# Altium PCB Altium_PCB_STM8_DevBoard_2024-07-22.pcbdoc
Units mm, origin at the board's own origin, x right, y up, seen from the top; angles counter-clockwise.
Board outline 85.34 x 122.81 mm, 2 copper layers (Top Layer, Bottom Layer); 28 components, 47 nets, 163 pads, 33 vias.
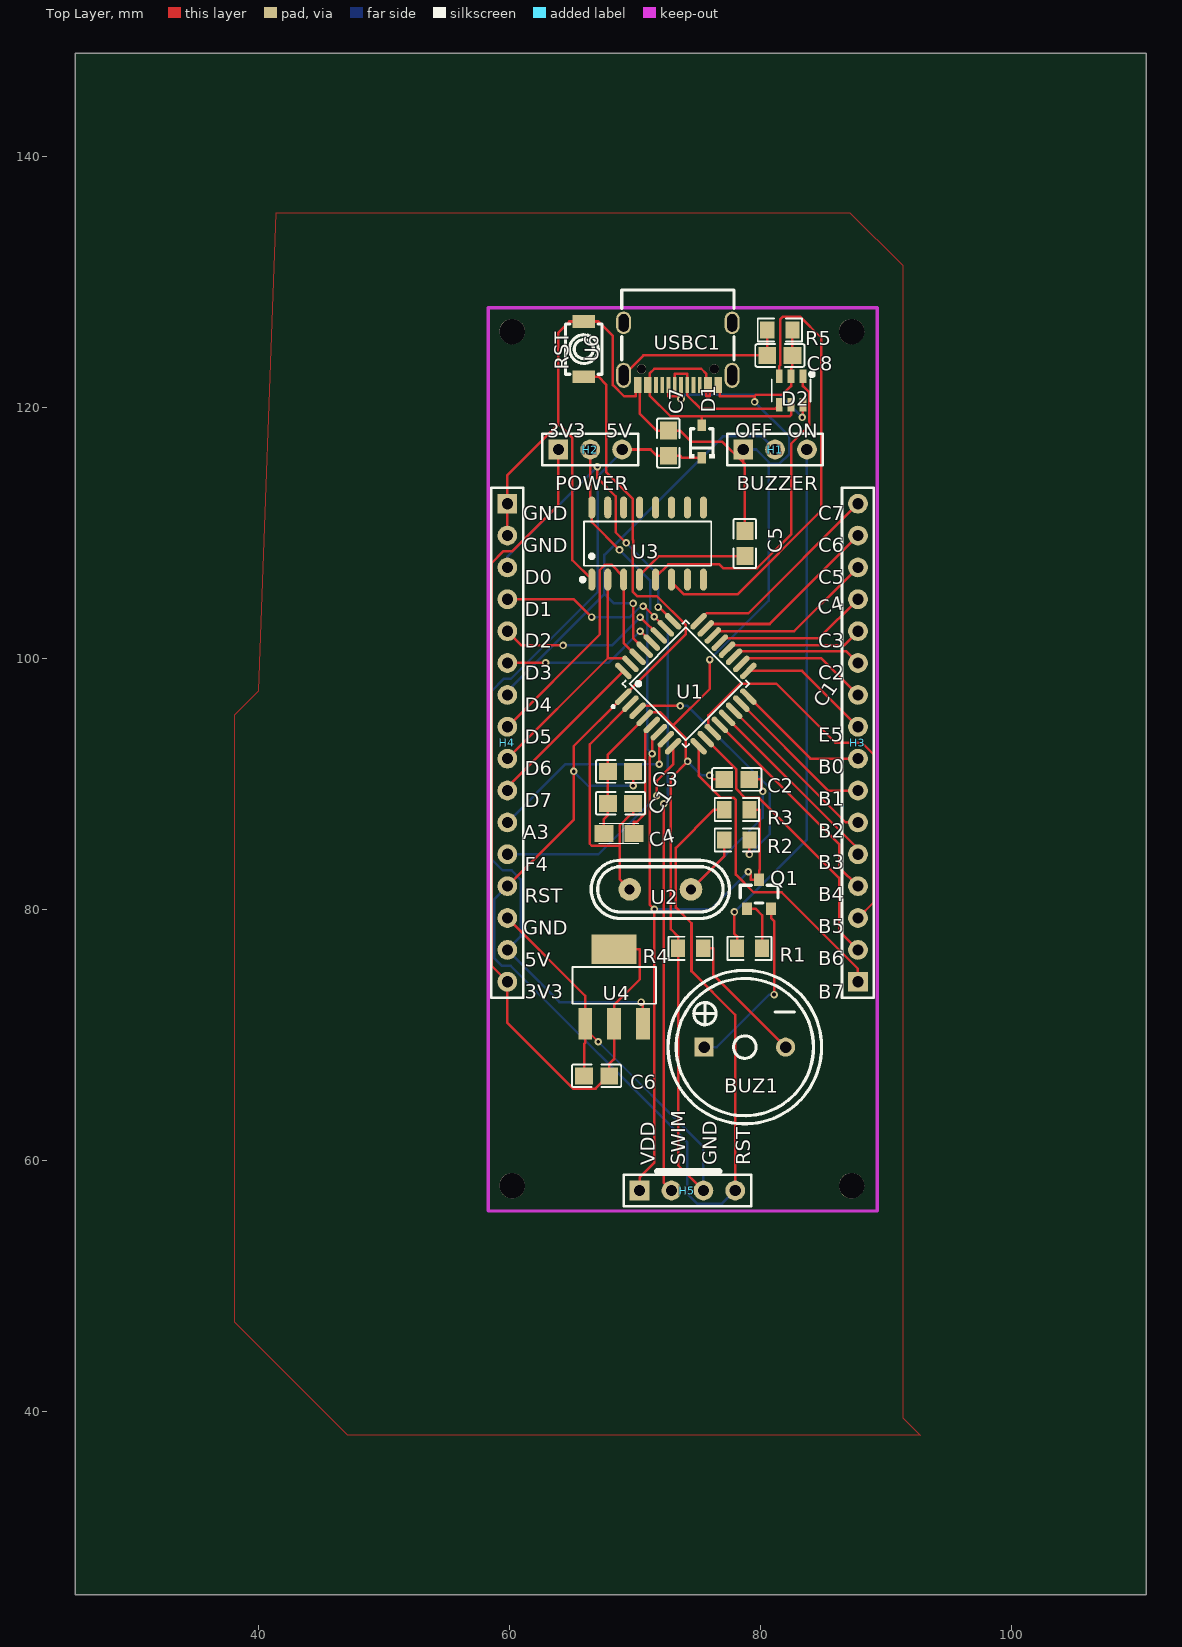
[diagram p0: Top Layer view]
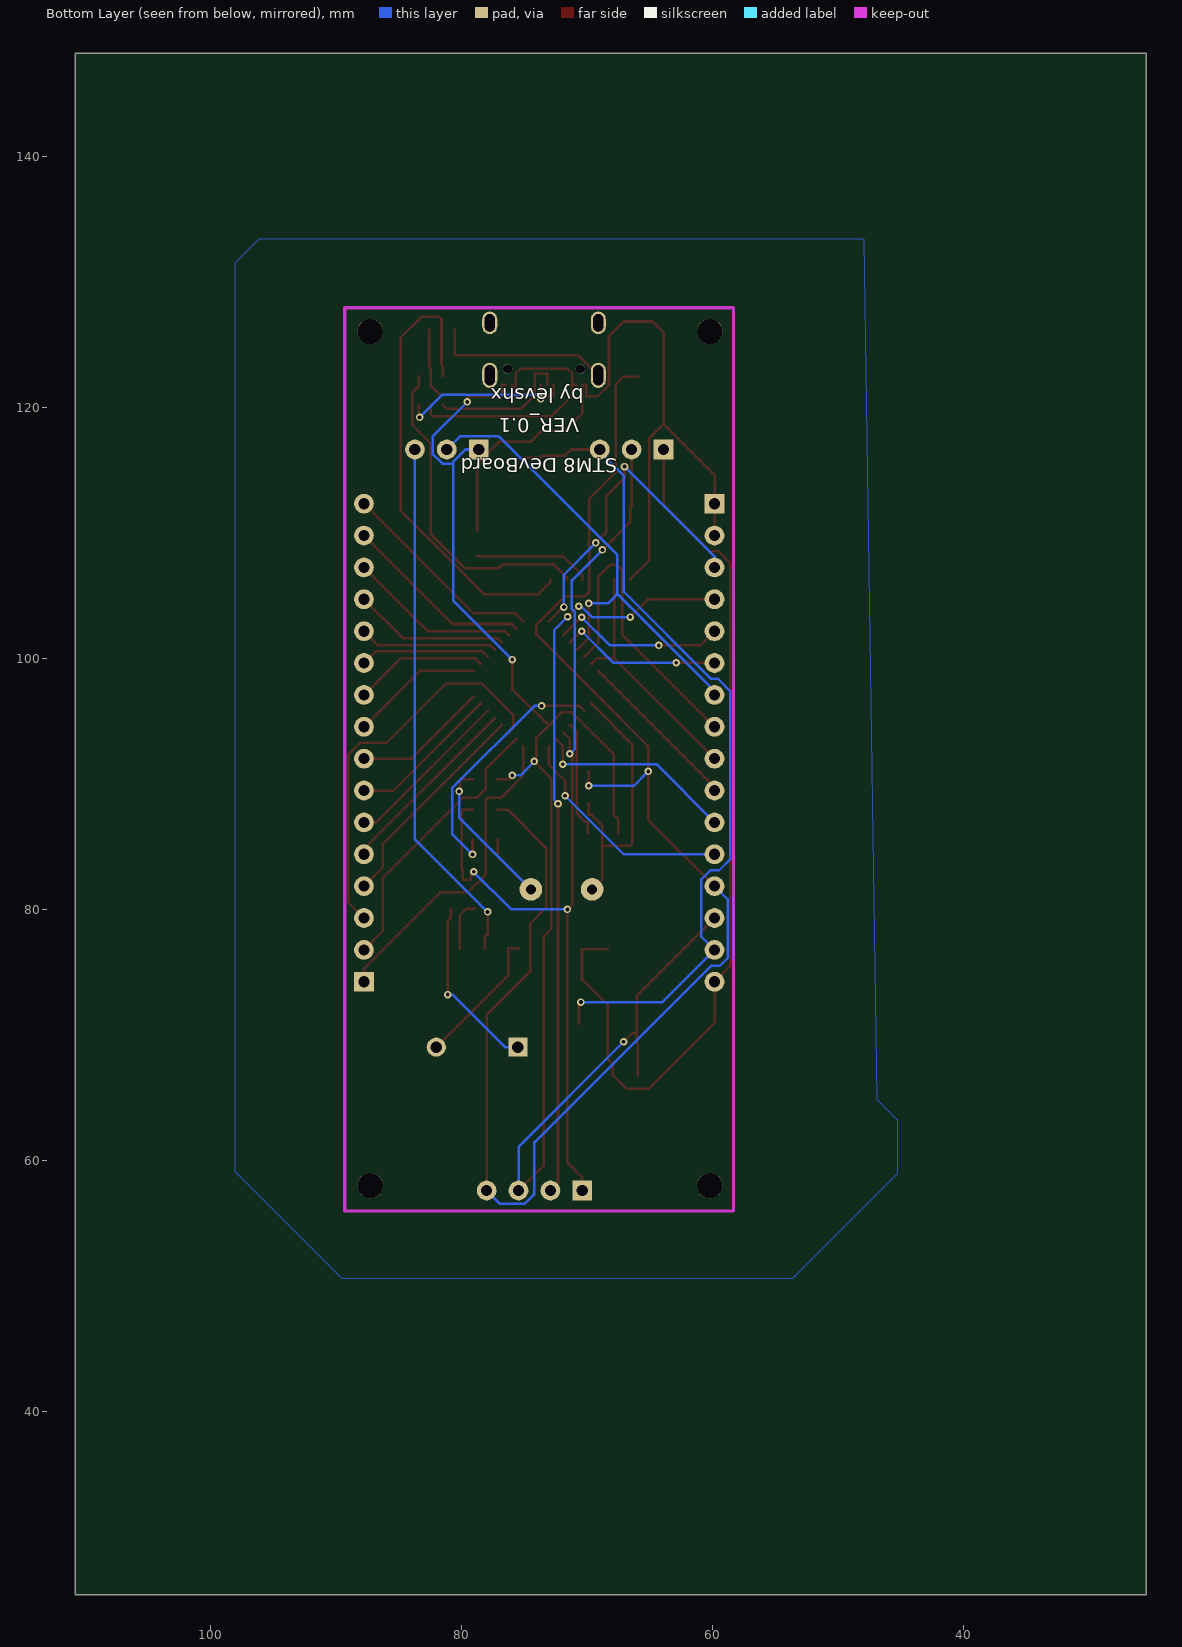
[diagram p1: Bottom Layer view, seen from below]

## Layer stack, top to bottom
Top Layer: signal copper (thickness not stored)
Dielectric: dielectric 0.32, FR-4, Dk 4.8
Bottom Layer: signal copper (thickness not stored)

## Board outline
110.744,25.4 25.4,25.4 25.4,148.209 110.744,148.209

## Components (designator, comment, footprint, x,y, rotation, side; value= is the part's Value field where it differs from the comment)
BUZ1 "BUZZER_12X9RM6.5" BUZ-TH_BD12.0-P6.50-D0.6_SEA-1285F 78.74,69.025 r0 top
C1 "20p" C0805 68.834,88.456 r0 top
C2 "20p" C0805 78.105,90.361 r0 top
C3 "10n" C0805 68.834,90.995 r0 top
C4 "680n" CASE-A_3216 68.707,86.042 r180 top
C5 "100n" C0805 78.74,109.156 r270 top
C6 "100n" C0805 66.929,66.739 r0 top
C7 "100n" C0805 72.644,117.157 r270 top
C8 "1n" C0805 81.534,124.142 r0 top
D1 "1N5819WS S4" SOD-323_L1.6-W1.3-LS2.7-RD 75.311,117.284 r90 top
D2 "MSUSBLC6-2SC6" SOT-23-6_L2.9-W1.6-P0.95-LS2.8-BL 82.423,121.349 r180 top
H1 "HDR-F-2.54_1x3" HDR-F-2.54_1X3 81.153,116.649 r0 top
H2 "HDR-F-2.54_1x3" HDR-F-2.54_1X3 66.421,116.649 r0 top
H3 "HDR-M-2.54_1x16" HDR-F-2.54_1X16 87.757,93.281 r90 top
H4 "HDR-M-2.54_1x16" HDR-F-2.54_1X16 59.817,93.281 r270 top
H5 "HDR-M-2.54_1x4" HDR-F-2.54_1X4 74.168,57.594 r0 top
Q1 "S9013_C431712" SOT-23_L2.9-W1.3-P1.90-LS2.4-BR 79.883,81.216 r270 top
R1 "3k" R0805 79.121,76.898 r0 top
R2 "60R" R0805 78.105,85.534 r0 top
R3 "10k" R0805 78.105,87.947 r0 top
R4 "47R" R0805 74.422,76.898 r0 top
R5 "1M" R0805 81.534,126.174 r180 top
U1 "STM8S003K3T6C" LQFP-32_L7.0-W7.0-P0.80-LS9.0-BL 74.041,97.98 r315 top
U2 "16MHZ" HC-49US_L11.0-W4.6-P4.88 72.009,81.597 r180 top
U3 "CH340C" SOP-16_L10.0-W3.9-P1.27-LS6.0-BL 70.993,109.156 r0 top
U4 "AMS1117-3.3RG" SOT-223-3_L6.4-W3.5-P2.30-LS7.0-BR 68.326,73.85 r270 top
U6 "RST BTN" SW-SMD_L3.9-W2.9-LS4.9-L 65.913,124.65 r90 top
USBC1 "TYPE-C-31-M-12" USB-C_SMD-TYPE-C-31-M-12 73.406,124.269 r180 top

## Footprints (in the part's own frame and the unit in brackets; to place one, negate y for a bottom-side part, rotate by r counter-clockwise, add the part's x,y. Pads: shape width x height; smd on the part's side, far side on the other; paste and mask are expansions set on the pad)
BUZ-TH_BD12.0-P6.50-D0.6_SEA-1285F [mil]
  rect 60x60 hole 36 paste+0 mask+1.97: 1(-127.95,0)
  round 60 hole 36 paste+0 mask+1.97: 2(127.95,0)
  silkscreen extent -241,-241 241,241
C0805 [mm]
  rect 1.41x1.35 smd paste-100 mask+0.051: 1(-1,0) 2(1,0)
  silkscreen extent -1.96,-0.9 1.96,0.9
CASE-A_3216 [mm]
  rect 1.5x1.359 smd paste+0 mask+0.051: 1(-1.2,0) 2(1.2,0)
  silkscreen extent -1.6,-0.8 1.6,0.8
HC-49US_L11.0-W4.6-P4.88 [mm]
  round 1.8 hole 0.8 paste+0 mask+0.051: 1(-2.44,0) 2(2.44,0)
  silkscreen extent -5.51,-2.32 5.51,2.32
HDR-F-2.54_1X3 [mil]
  rect 62x62 hole 35 paste+0 mask+2: 1(-100,0)
  round 62 hole 35 paste+0 mask+2: 2(0,0)
  round 62 hole 36 paste+0 mask+2: 3(100,0)
  silkscreen extent -150,-49 150,50
HDR-F-2.54_1X4 [mil]
  rect 62x62 hole 35 paste+0 mask+2: 1(-150,0)
  round 62 hole 35 paste+0 mask+2: 2(-50,0) 3(50,0) 4(150,0)
  silkscreen extent -200,-50 200,50
HDR-F-2.54_1X16 [mil]
  rect 62x62 hole 35 paste+0 mask+2: 1(-750,0)
  round 62 hole 35 paste+0 mask+2: 2(-650,0) 3(-550,0) 4(-450,0) 5(-350,0) 6(-250,0) 7(-150,0) 8(-50,0) 9(50,0) 10(150,0) 11(250,0) 12(350,0) 13(450,0) 14(550,0) 15(650,0) 16(750,0)
  silkscreen extent -800,-50 800,50
LQFP-32_L7.0-W7.0-P0.80-LS9.0-BL [mm]
  oval 0.448x1.684 smd paste+0 mask+0.051: 1(-2.8,-4.242) 2(-2,-4.242) 3(-1.2,-4.242) 4(-0.4,-4.242) 5(0.4,-4.242) 6(1.2,-4.242) 7(2,-4.242) 8(2.8,-4.242) 17(2.8,4.242) 18(2,4.242) 19(1.2,4.242) 20(0.4,4.242) 21(-0.4,4.242) 22(-1.2,4.242) 23(-2,4.242) 24(-2.8,4.242)
  oval 1.684x0.448 smd paste+0 mask+0.051: 9(4.242,-2.8) 10(4.242,-2) 11(4.242,-1.2) 12(4.242,-0.4) 13(4.242,0.4) 14(4.242,1.2) 15(4.242,2) 16(4.242,2.8) 25(-4.242,2.8) 26(-4.242,2) 27(-4.242,1.2) 28(-4.242,0.4) 29(-4.242,-0.4) 30(-4.242,-1.2) 31(-4.242,-2) 32(-4.242,-2.8)
  silkscreen extent -3.58,-5.48 3.58,3.58
R0805 [mm]
  rect 1.133x1.377 smd paste-100 mask+0.051: 1(-1,0) 2(1,0)
  silkscreen extent -1.76,-0.92 1.76,0.92
SOD-323_L1.6-W1.3-LS2.7-RD [mm]
  rect 0.9x0.7 smd paste+0 mask+0.05: 1(-1.3,0) 2(1.3,0)
  silkscreen extent -1.32,-1.02 1.02,1.02
SOP-16_L10.0-W3.9-P1.27-LS6.0-BL [mm]
  oval 0.56x1.745 smd paste+0 mask+0.051: 1(-4.445,-2.873) 2(-3.175,-2.873) 3(-1.905,-2.873) 4(-0.635,-2.873) 5(0.635,-2.873) 6(1.905,-2.873) 7(3.175,-2.873) 8(4.445,-2.873) 9(4.445,2.873) 10(3.175,2.873) 11(1.905,2.873) 12(0.635,2.873) 13(-0.635,2.873) 14(-1.905,2.873) 15(-3.175,2.873) 16(-4.445,2.873)
  silkscreen extent -5.33,-3.02 5.08,1.77
SOT-23-6_L2.9-W1.6-P0.95-LS2.8-BL [mm]
  rect 0.532x1.072 smd paste+0 mask+0.051: 1(-0.95,-1.149) 2(0,-1.149) 3(0.95,-1.149) 4(0.95,1.149) 5(0,1.149) 6(-0.95,1.149)
  silkscreen extent -1.82,-1.45 1.54,0.89
SOT-23_L2.9-W1.3-P1.90-LS2.4-BR [mm]
  rect 1x0.8 smd paste+0 mask+0.051: 1(1.15,-0.95) 2(1.15,0.95) 3(-1.15,0)
  silkscreen extent -0.7,-1.5 0.7,1.5
SOT-223-3_L6.4-W3.5-P2.30-LS7.0-BR [mm]
  rect 2.5x1.1 smd paste+0 mask+0.051: 1(2.97,-2.3) 2(2.97,0) 3(2.97,2.3)
  rect 2.34x3.6 smd paste+0 mask+0.051: 4(-2.97,0)
  silkscreen extent -1.57,-3.33 1.37,3.33
SW-SMD_L3.9-W2.9-LS4.9-L [mm]
  rect 1x1.8 smd paste+0 mask+0.051: 1(-2.2,0) 2(2.2,0)
  silkscreen extent -2,-1.45 2,1.45
USB-C_SMD-TYPE-C-31-M-12 [mm]
  oval 1.2x2 hole 0.8 slot 1.6 at 90 deg paste+0 mask+0.051: 0(-4.325,1.706) 1(4.325,1.706)
  oval 1.2x1.8 hole 0.8 slot 1.4 at 90 deg paste+0 mask+0.051: 2(4.325,-2.474) 3(-4.325,-2.474)
  rect 0.3x1.3 smd paste-100 mask+0.051: A1(-3.35,2.474) A4(-2.55,2.474) A5(-1.25,2.474) A6(-0.25,2.474) A7(0.25,2.474) A8(1.25,2.474) A9(2.55,2.474) A12(3.35,2.474) B1(3.05,2.474) B4(2.25,2.474) B5(1.75,2.474) B6(0.75,2.474) B7(-0.75,2.474) B8(-1.75,2.474) B9(-2.25,2.474) B12(-3.05,2.474)
  round 0.75 hole 0.75 unplated paste+0: ""(-2.9,1.206) ""(2.9,1.206)
  silkscreen extent -4.47,-5.09 4.47,0.49

## Free pads (board coordinates)
  round 2.032 hole 2.032 unplated paste+0: ""(60.198,57.975) ""(60.198,126.047) ""(87.249,57.975) ""(87.249,126.047)

## Via types
v1: diameter 0.6, hole 0.305, Top Layer to Bottom Layer, tented both sides, 33 vias

## Nets (pads, with @x,y where several pads share a name; then routed paths per layer and width w, separated by ;. In a path a pad name is that pad's centre, name@x,y a point inside that pad or via, vN(x,y) a via of type N, cw(c..) or ccw(c..) an arc to the next point about the centre after c; other vN are vias at no path point)
3V3: C6.2 H2.1 H4.16 U4.2 U4.4 | length 73.1
  Top Layer w0.2: H2.1 63.881,112.221 60.181,108.521 59.478,108.521 58.572,107.615 58.572,75.476 H4.16 59.817,70.948 65.05,65.715 66.844,65.715 67.929,66.8 C6.2@67.929,67.202 ; C6.2 C6.2@67.929,67.202 ; U4.4 70.378,76.821 70.378,74.435 68.326,72.383 U4.2 68.326,68.063 67.929,67.666 C6.2@67.929,67.202
4V5: C7.2 D1.1 H2.3 H4.15 U4.3 | length 67.1
  Top Layer w0.2: H2.3 71.225,116.649 71.717,116.158 C7.2 73.571,116.158 73.744,115.985 D1.1 ; v1(70.469,72.616) 70.469,72.54 70.626,72.383 U4.3
  Bottom Layer w0.2: H2.3 68.961,116.468 67.04,114.547 67.04,105.314 60.086,98.361 59.519,98.361 58.572,97.414 58.572,83.987 59.438,83.121 60.148,83.121 60.878,82.392 60.878,77.832 H4.15 63.973,72.616 v1(70.469,72.616)
BEEP: H1.3 R1.1 | length 42.2
  Top Layer w0.2: v1(77.908,79.794) 77.908,78.052 78.121,77.839 R1.1
  Bottom Layer w0.2: v1(77.908,79.794) 83.693,85.579 H1.3
BUZ1_1: BUZ1.1 Q1.2 | length 14.3
  Top Layer w0.2: Q1.2 80.833,79.314 81.078,79.069 v1(81.078,73.208)
  Bottom Layer w0.2: BUZ1.1 76.504,69.025 80.688,73.208 v1(81.078,73.208)
BUZ1_2: BUZ1.2 R4.2 | length 11.1
  Top Layer w0.2: R4.2 76.241,76.898 76.241,74.774 BUZ1.2
C8_1: C8.1 R5.2 USBC1.1 | length 14.1
  Top Layer w0.2: USBC1.1 70.66,124.142 79.577,124.142 C8.1 R5.2
CH_3V3: C5.2 U3.4 | length 9.3
  Top Layer w0.2: U3.4 70.358,106.602 71.913,108.157 C5.2
DM: D2.3 U3.6 | length 37.7
  Top Layer w0.2: U3.6 72.898,106.091 73.884,105.105 78.144,105.105 84.834,111.796 84.834,125.554 83.17,127.218 81.752,127.218 81.575,127.041 81.575,123.388 81.473,123.286 D2.3
DP: D2.1 U3.5 | length 26.1
  Top Layer w0.2: U3.5 71.628,106.48 72.649,107.5 76.716,107.5 77.018,107.198 79.73,107.198 82.424,109.891 82.424,117.111 83.894,118.581 83.894,121.189 83.373,121.709 D2.1
GND: C1.1 C2.1 C3.1 C4.2 C5.1 C6.1 C7.1 C8.2 D2.2 H1.1 H4.1 H4.2 H4.14 H5.3 R4.1 R5.1 U1.4 U3.1 U4.1 U6.2 USBC1.A1 USBC1.A12 USBC1.B1 USBC1.B12 | length 196.6
  Top Layer w0.2: H4.14 66.026,73.102 U4.1 U4.1@66.026,70.129 ; H4.2 H4.1 59.817,114.617 63.878,118.678 ; C6.1 65.929,69.281 66.026,69.378 U4.1@66.026,70.129 ; U3.1 65.005,107.827 65.005,117.55 63.878,118.678 ; v1(67.06,69.454) 66.385,70.129 U4.1@66.026,70.129 ; C4.2 67.507,86.728 67.507,87.192 67.834,87.519 C1.1 C3.1 67.834,92.339 U1.4 71.209,95.714 71.965,95.714 73.022,94.657 ; H5.3 73.422,59.61 R4.1 73.422,77.839 72.845,78.416 72.845,90.448 v1(74.185,91.788) 74.041,91.931 74.041,93.638 73.022,94.657 ; v1(75.938,90.676) 76.148,90.467 76.148,90.361 C2.1 ; v1(75.944,99.904) 75.944,97.578 73.022,94.657 ; USBC1.B12 USBC1.A1 76.756,120.893 79.522,120.893 ; H1.1 78.613,115.61 ; C5.1 78.74,115.483 78.613,115.61 ; v1(79.522,120.44) 79.522,120.893 ; R5.1 C8.2 82.534,123.215 82.423,123.104 D2.2 82.423,121.709 81.708,120.994 79.623,120.994 79.522,120.893 ; 63.878,118.678 63.878,125.967 64.761,126.85 U6.2 67.065,126.85 68.227,125.689 68.227,121.79 69.124,120.893 70.056,120.893 USBC1.A12 USBC1.B1 70.356,119.518 71.717,118.157 72.18,118.157 C7.1 73.571,118.157 74.444,117.284 76.938,117.284 78.613,115.61
  Bottom Layer w0.2: v1(67.06,69.454) 75.438,61.076 H5.3 ; v1(74.185,91.788) 75.296,90.676 v1(75.938,90.676) ; v1(75.944,99.904) 80.649,104.609 80.649,115.522 ; H1.1 79.653,116.649 80.649,115.653 80.649,115.522 ; v1(79.522,120.44) 82.291,117.671 82.291,116.301 81.512,115.522 80.649,115.522
NRST: C3.2 H4.13 H5.4 R3.1 U1.1 U6.1 | length 128.5
  Top Layer w0.2: H4.13 65.102,87.137 v1(65.102,90.998) 65.102,93.002 U1.1 74.039,101.939 74.039,102.652 71.725,104.967 70.162,104.967 69.797,105.332 69.797,108.925 69.843,108.971 69.843,109.43 69.797,109.476 69.797,112.741 67.691,114.847 67.691,121.825 67.065,122.451 U6.1 ; v1(69.834,89.853) C3.2 ; R3.1 76.286,87.947 73.245,84.907 73.245,80.139 74.492,78.893 74.492,75.086 77.978,71.6 H5.4
  Bottom Layer w0.2: H4.13 58.762,80.797 58.762,76.139 59.4,75.501 60.089,75.501 74.168,61.423 74.168,57.322 74.937,56.553 76.937,56.553 H5.4 ; v1(65.102,90.998) 66.247,89.853 v1(69.834,89.853)
PA3: H4.11 U1.7 | length 16.2
  Top Layer w0.2: v1(71.916,91.573) 71.916,93.027 U1.7
  Bottom Layer w0.2: H4.11 64.458,91.573 v1(71.916,91.573)
PB0: H3.8 U1.16 | length 10.8
  Top Layer w0.2: U1.16 83.97,92.011 H3.8
PB1: H3.7 U1.15 | length 12.2
  Top Layer w0.2: U1.15 85.378,89.471 H3.7
PB2: H3.6 U1.14 | length 13.6
  Top Layer w0.2: U1.14 86.787,86.931 H3.6
PB3: H3.5 U1.13 | length 15.2
  Top Layer w0.2: U1.13 87.757,84.83 H3.5
PB4: H3.4 U1.12 | length 17.4
  Top Layer w0.2: U1.12 86.258,85.197 86.258,83.35 H3.4
PB5: H3.3 U1.11 | length 31.6
  Top Layer w0.2: U1.11 75.843,94.481 75.843,95.465 78.358,97.98 81.252,97.98 85.951,93.281 88.087,93.281 89.014,92.355 89.014,80.568 H3.3
PB6: H3.2 U1.10 | length 22.5
  Top Layer w0.2: U1.10 75.638,93.567 78.064,91.141 78.064,89.596 78.77,88.89 79.88,88.89 86.258,82.511 86.258,78.27 H3.2
PB7: H3.1 U1.9 | length 25.9
  Top Layer w0.2: U1.9@75.061,93.001 75.061,90.657 76.827,88.89 77.867,88.89 78.035,88.722 78.035,82.775 79.447,81.363 81.665,81.363 87.757,75.271 H3.1
PC1: H3.10 U1.18 | length 10.7
  Top Layer w0.2: U1.18 78.897,100.008 84.84,100.008 H3.10
PC2: H3.11 U1.19 | length 10.4
  Top Layer w0.2: U1.19 78.309,100.552 86.837,100.552 H3.11
PC3: H3.12 U1.20 | length 11
  Top Layer w0.2: U1.20 77.672,101.046 86.632,101.046 H3.12
PC4: H3.13 U1.21 | length 12.4
  Top Layer w0.2: U1.21 77.107,101.612 84.657,101.612 H3.13
PC5: H3.14 U1.22 | length 13.8
  Top Layer w0.2: U1.22 76.541,102.178 82.683,102.178 H3.14
PC6: H3.15 U1.23 | length 15.2
  Top Layer w0.2: U1.23 75.975,102.743 80.709,102.743 H3.15
PC7: H3.16 U1.24 | length 16.6
  Top Layer w0.2: U1.24 75.702,103.601 79.027,103.601 H3.16
PD0: H4.3 U1.25 | length 25.9
  Top Layer w0.2: v1(66.992,115.282) 66.992,114.369 68.453,112.907 68.453,110.036 v1(69.289,109.2) ; v1(71.823,104.085) 71.896,104.085 U1.25
  Bottom Layer w0.2: H4.3 59.817,108.107 v1(66.992,115.282) ; v1(69.289,109.2) 71.823,106.666 v1(71.823,104.085)
PD1_SWIM: H4.4 H5.2 U1.26 | length 60.9
  Top Layer w0.2: H4.4 65.116,104.712 v1(66.533,103.295) ; v1(70.632,104.156) 70.694,104.156 v1(71.527,103.322) U1.26 ; v1(72.291,88.424) 72.291,58.201 H5.2
  Bottom Layer w0.2: v1(66.533,103.295) 69.584,103.295 70.445,104.156 v1(70.632,104.156) ; v1(71.527,103.322) 72.605,102.244 72.605,88.738 v1(72.291,88.424)
PD2: H4.5 U1.27 | length 14.1
  Top Layer w0.2: H4.5 60.953,101.036 v1(64.257,101.036) ; v1(70.398,103.277) 70.442,103.277 U1.27
  Bottom Layer w0.2: v1(64.257,101.036) 68.157,101.036 v1(70.398,103.277)
PD3: H4.6 U1.28 | length 12.9
  Top Layer w0.2: H4.6 59.836,99.651 v1(62.865,99.651) ; v1(70.399,102.168) 70.419,102.168 U1.28
  Bottom Layer w0.2: v1(62.865,99.651) 67.881,99.651 v1(70.399,102.168)
PD4_BUZZER: H1.2 H4.7 U1.29 | length 39
  Top Layer w0.2: v1(69.842,104.385) 69.842,101.613 U1.29
  Bottom Layer w0.2: H4.7 59.817,97.399 67.553,105.136 ; v1(69.842,104.385) 68.304,104.385 67.553,105.136 ; H1.2 80.112,117.691 76.997,117.691 67.553,108.248 67.553,105.136
PD5_MCU_TX: H4.8 U1.30 U3.3 | length 24.8
  Top Layer w0.2: H4.8 67.183,101.917 67.183,107.04 67.614,107.471 68.106,107.471 69.088,106.489 U3.3 69.088,101.237 U1.30
PD6_MCU_RX: H4.9 U1.31 U3.2 | length 19.6
  Top Layer w0.2: H4.9 67.818,100.013 ; U3.2 67.818,100.013 ; U1.31 69.181,100.013 67.818,100.013
PD7: H4.10 U1.32 | length 13.4
  Top Layer w0.2: H4.10 59.817,89.755 U1.32
PE5: H3.9 U1.17 | length 10.6
  Top Layer w0.2: U1.17 83.308,99 H3.9
PF4: H4.12 U1.8 | length 18.3
  Top Layer w0.2: v1(71.727,89.054) 71.727,90.254 73.021,91.549 U1.8@73.021,93.001
  Bottom Layer w0.2: H4.12 67.065,84.391 v1(71.727,89.054)
R1_2: Q1.1 R1.2 | length 4
  Top Layer w0.2: Q1.1 79.585,80.066 80.121,79.531 R1.2
S$4588: 
U1_2: C1.2 U1.2 U2.2 | length 22.7
  Top Layer w0.2: U2.2 68.779,82.388 68.779,85.067 ; U1.2 66.382,93.15 66.382,85.23 66.545,85.067 68.779,85.067 ; C1.2 69.834,87.528 69.602,87.528 68.779,86.705 68.779,85.067
U1_3: R2.2 U1.3 | length 20.5
  Top Layer w0.2: U1.3 70.583,96.22 v1(73.602,96.22) ; v1(79.105,84.382) R2.2
  Bottom Layer w0.2: v1(73.602,96.22) 74.169,96.22 80.73,89.659 80.73,86.006 v1(79.105,84.382)
U1_5: C4.1 U1.5 | length 9.4
  Top Layer w0.2: C4.1 69.907,86.974 70.129,86.974 70.793,87.638 70.793,94.167 U1.5
U2_1: C2.2 R2.1 U2.1 | length 17.2
  Top Layer w0.2: U2.1 77.105,84.254 R2.1 ; C2.2 80.062,90.361 80.062,89.516 v1(80.171,89.407)
  Bottom Layer w0.2: U2.1 80.171,87.32 v1(80.171,89.407)
USB_DM: D2.4 USBC1.A7 USBC1.B7 | length 11.5
  Top Layer w0.2: USBC1.A7 73.156,122.697 73.158,122.699 74.154,122.699 74.156,122.697 USBC1.B7 74.156,120.964 75.234,119.886 81.16,119.886 D2.4
USB_DP: D2.6 USBC1.A6 USBC1.B6 | length 14.6
  Top Layer w0.2: USBC1.B6 72.656,121.432 72.656,120.893 72.658,120.891 73.654,120.891 v1@73.656,120.893 ; v1(73.656,120.681) v1@73.656,120.893 ; USBC1.A6 v1@73.656,120.893 ; v1(83.322,119.204) 83.373,119.255 83.373,119.411 D2.6
  Bottom Layer w0.2: v1(73.656,120.681) 73.969,120.994 81.532,120.994 v1(83.322,119.204)
USB_V: D1.2 D2.5 USBC1.A4 USBC1.A9 USBC1.B4 USBC1.B9 | length 23.4
  Top Layer w0.2: USBC1.A9 USBC1.B4 ; D1.2 75.311,119.287 ; USBC1.A4 75.956,120.893 75.656,120.893 USBC1.B9 75.656,122.698 75.271,123.082 71.541,123.082 71.156,122.698 USBC1.B4 ; D2.5 82.423,119.411 82.299,119.287 75.311,119.287 ; USBC1.B4 71.156,120.968 72.837,119.287 75.311,119.287
VDD: H2.2 H5.1 Q1.3 R3.2 U1.6 U3.16 | length 80.5
  Top Layer w0.2: H2.2 66.421,112.156 U3.16 66.548,110.855 v1(68.753,108.65) ; H5.1 70.358,58.634 71.541,59.817 v1(71.541,79.998) 71.173,80.365 71.173,92.219 v1(71.354,92.4) 71.354,93.597 U1.6 ; v1(79.009,82.995) 79.231,82.774 79.231,82.367 Q1.3 79.883,83.119 79.945,83.18 79.945,87.926 79.924,87.947 R3.2
  Bottom Layer w0.2: v1(68.753,108.65) 71.186,106.217 71.186,103.926 70.953,103.693 70.953,92.801 v1(71.354,92.4) ; v1(71.541,79.998) 76.012,79.998 v1(79.009,82.995)
pads on no net: U3.7 U3.8 U3.9 U3.10 U3.11 U3.12 U3.13 U3.14 U3.15 USBC1. USBC1.0 USBC1.2 USBC1.3 USBC1.A5 USBC1.A8 USBC1.B5 USBC1.B8

## Polygon pours and split planes (outlines as drawn)
GND on Bottom Layer (solid): 47.879,133.413 96.139,133.413 98.044,131.508 98.044,59.118 89.535,50.609 53.594,50.609 45.212,58.991 45.212,63.182 46.863,64.834
GND on Top Layer (solid): 41.402,135.509 87.122,135.509 91.313,131.318 91.313,39.497 92.71,38.1 47.117,38.1 38.1,47.117 38.1,95.504 40.005,97.409

## Silkscreen, mask and mechanical layers (free items; w line width, h text height)
Top Overlay:
  lines w0.508 net S$4588: 71.755,59.118 76.708,59.118
  text "RST" at 64.706,122.999 h1.14 r90
  text "3V3" at 62.992,117.602 h1.14
  text "5V" at 67.691,117.602 h1.14
  text "OFF" at 77.978,117.602 h1.14
  text "ON" at 82.169,117.602 h1.14
  text "POWER" at 63.627,113.411 h1.14
  text "BUZZER" at 78.105,113.411 h1.14
  text "GND" at 61.087,110.998 h1.14
  text "C7" at 84.582,110.998 h1.14
  text "GND" at 61.087,108.458 h1.14
  text "C6" at 84.582,108.458 h1.14
  text "D0" at 61.214,105.918 h1.14
  text "C5" at 84.582,105.918 h1.14
  text "C4" at 84.73,103.397 h1.14 r15
  text "D1" at 61.214,103.378 h1.14
  text "D2" at 61.214,100.838 h1.14
  text "C3" at 84.582,100.838 h1.14
  text "D3" at 61.214,98.298 h1.14
  text "C2" at 84.582,98.298 h1.14
  text "C1" at 85.05,96.002 h1.14 r55
  text "D4" at 61.214,95.758 h1.14
  text "E5" at 84.582,93.345 h1.14
  text "D5" at 61.214,93.218 h1.14
  text "B0" at 84.582,90.805 h1.14
  text "D6" at 61.214,90.678 h1.14
  text "B1" at 84.582,88.265 h1.14
  text "D7" at 61.214,88.138 h1.14
  text "B2" at 84.582,85.725 h1.14
  text "A3" at 61.087,85.598 h1.14
  text "B3" at 84.582,83.185 h1.14
  text "F4" at 61.214,83.058 h1.14
  text "B4" at 84.582,80.645 h1.14
  text "RST" at 61.214,80.518 h1.14
  text "B5" at 84.582,78.105 h1.14
  text "GND" at 61.087,77.978 h1.14
  text "B6" at 84.582,75.565 h1.14
  text "5V" at 61.214,75.438 h1.14
  text "3V3" at 61.214,72.898 h1.14
  text "B7" at 84.582,72.898 h1.14
  text "VDD" at 71.564,59.627 h1.14 r90
  text "SWIM" at 73.977,59.627 h1.14 r90
  text "GND" at 76.517,59.627 h1.14 r90
  text "RST" at 79.184,59.627 h1.14 r90
Bottom Overlay:
  text "by levshx" at 70.231,121.539 h1.14 r180
  text "VER_0.1" at 70.612,119.126 h1.14 r180
  text "STM8 DevBoard" at 67.564,115.951 h1.14 r180